# Altium PCB 23972修改.PcbDoc (part 2 of 2)
Units mil, origin at the board's own origin, x right, y up, seen from the top; angles counter-clockwise.
Board outline 7085.81 x 4390 mil, 3 copper layers (Top Layer, Mid-Layer 1, Bottom Layer); 28 components, 107 nets, 1198 pads, 224 vias.
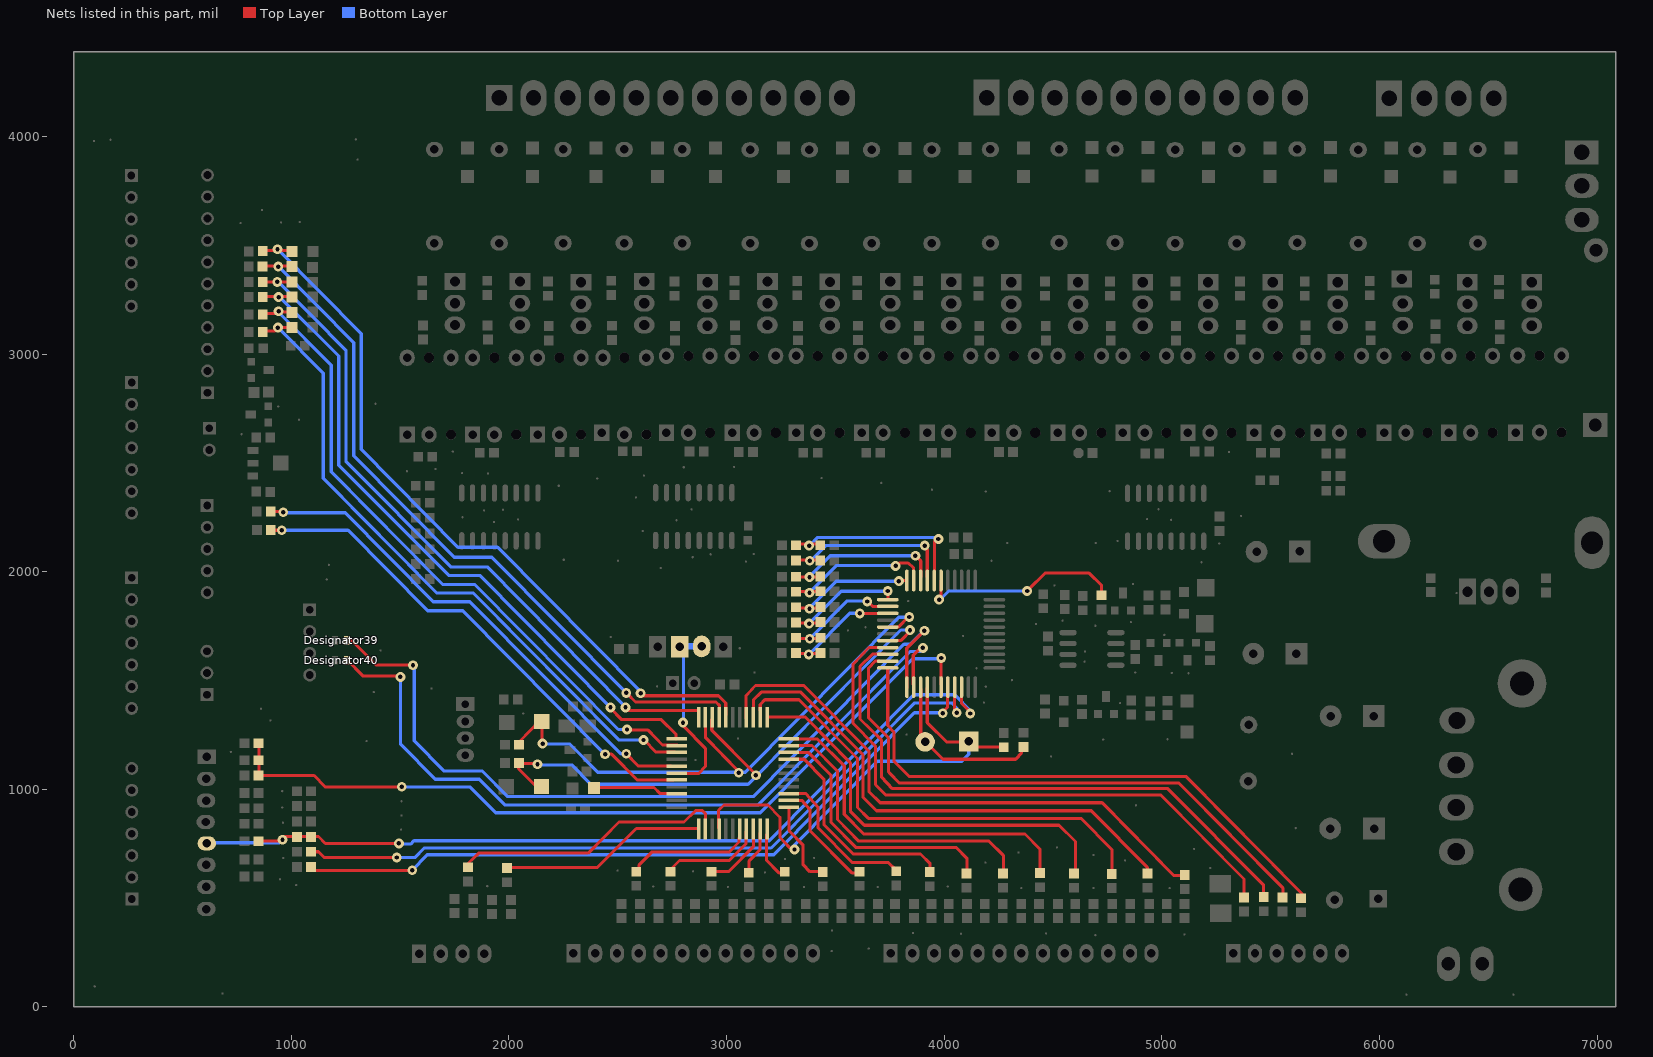
[diagram p2: the nets of this part, all layers, seen from the top]

## Via types
v1: diameter 45, hole 20, Top Layer to Bottom Layer, 219 vias
v2: diameter 161.42, hole 161.42, Top Layer to Bottom Layer, 4 vias
v3: diameter 20, hole 20, Top Layer to Bottom Layer, 1 vias

## Nets (pads, with @x,y where several pads share a name; then routed paths per layer and width w, separated by ;. In a path a pad name is that pad's centre, name@x,y a point inside that pad or via, vN(x,y) a via of type N, cw(c..) or ccw(c..) an arc to the next point about the centre after c; other vN are vias at no path point) (continued)
NewNet55: ?.58 pad.0@960.4,768.33 pad.0@1495.05,751.67 pad.0@4120.46,1348.33 pad.250 pad.256 pad.575 pad.839 | length 4094.3
  Top Layer w14: pad.256@858.09,763.33 v1@953.8,763.33 ; pad.0@962.05,770 962.05,783.33 1125.41,783.33 1156.77,751.67 pad.0@1493.4,751.67 ; ?.58@4079.21,1468.33 4079.21,1396.67 v1@4122.11,1353.33
  Bottom Layer w15: pad.839@606.44,754.58 944.72,754.58 v1@955.86,765.83 ; v1@1486.8,748.75 1548.68,748.75 1563.94,764.17 3197.61,764.17 3860.97,1434.17 4048.68,1434.17 v1@4123.35,1358.75
  other v1: 1495.05,751.67 960.4,768.33 4120.46,1348.33
NewNet56: ?.59 pad.0@1485.15,686.67 pad.0@4057.76,1351.67 pad.249 | length 3395.3
  Top Layer w14: pad.249@1094.06,713.33 1125.41,713.33 1151.82,686.67 pad.0@1480.2,686.67 ; v1@4047.86,1358.33 ?.59@4047.86,1465
  Bottom Layer w15: pad.0@1487.21,686.67 1568.48,686.67 1611.8,730.42 3205.03,730.42 3865.1,1397.08 4035.07,1397.08 4058.58,1373.33 v1@4058.58,1359.58
  other v1: 1485.15,686.67 4057.76,1351.67
NewNet57: ?.60 pad.0@1556.11,628.33 pad.0@3993.4,1350 pad.248 | length 3333.9
  Top Layer w14: pad.248@1084.16,646.67 1102.31,626.67 pad.0@1554.46,626.67 ; v1@3991.75,1355 4016.5,1378.33 ?.60@4016.5,1456.67
  Bottom Layer w15: pad.0@1553.63,626.67 1625.41,699.17 1652.64,699.17 3217,699.17 3863.45,1352.08 pad.0@3993.4,1352.08
  other v1: 1556.11,628.33 3993.4,1350
NewNet58: ?.61 pad.0@1508.25,1011.67 pad.0@3986.8,1603.33 pad.260 pad.261 pad.262 | length 3757.6
  Top Layer w14: pad.262@851.49,1210 851.49,1063.33 1105.61,1063.33 1155.12,1011.67 v1@1500,1011.67 ; ?.61@3985.15,1481.67 pad.0@3985.15,1606.67
  Bottom Layer w15: v1@1514.03,1010.42 1822.61,1010.42 1939.77,892.08 3154.7,892.08 3855.61,1600 pad.0@3984.74,1600
  other v1: 1508.25,1011.67 3986.8,1603.33
NewNet59: ?.30 ?.63 pad.0@3312.71,723.75 pad.498 pad.813 | length 2149
  Top Layer w12: 3187.47,929.33 3246.88,871
  Top Layer w14: ?.30@2963.7,821.67 2963.7,903.33 2988.45,928.33 3186.47,928.33 ; 3245.88,870 3245.88,778.33 3291.25,732.08 ; ?.63@3922.44,1466.67 3922.44,1306.67 4013.2,1216.67 pad.813@4115.51,1216.67 ; pad.813@4136.96,1195 pad.498@4282.18,1195
  Bottom Layer w15.75: v1@3305.28,735.42 3692.24,1130 4081.68,1130 4113.45,1162.08 pad.813@4113.45,1220.83 ; pad.0@3312.29,728.33 v1@3325.08,725.42
  other v1: 3312.71,723.75
NewNet60: ?.64 pad.497 pad.814 | length 769.3
  Top Layer w14: ?.64@3892.74,1460 3892.74,1243.33 3995.05,1138.33 4328.38,1138.33 4356.44,1168.33 pad.497@4356.44,1200
NewNet61: ?.65 Designator40.1@1257.12,1594 pad.0@1501.65,1516.67 pad.0@3902.64,1650 | length 3584
  Top Layer w14: Designator40.1@1257.12,1594 1331.12,1520 pad.0@1498.35,1520 ; ?.65@3858.09,1481.67 3858.09,1616.67 v1@3892.74,1650
  Bottom Layer w15: pad.0@1502.47,1516.67 1502.47,1207.5 1661.72,1046.67 1863.86,1046.67 1981.02,928.33 3145.63,928.33 3843.23,1632.92 3890.26,1632.92 pad.0@3905.53,1648.33
  other v1: 1501.65,1516.67 3902.64,1650
NewNet62: ?.66 Designator39.1 pad.0@1559.41,1570 pad.0@3909.24,1728.33 | length 3750.4
  Top Layer w14: Designator39.1@1257.12,1684 1278,1684 1390.33,1571.67 pad.0@1556.11,1571.67 ; ?.66@3828.38,1466.67 3828.38,1648.33 pad.0@3910.89,1731.67
  Bottom Layer w15: v1@1565.59,1565 1565.59,1223.75 1703.8,1084.17 1879.13,1084.17 1995.46,966.67 3122.53,966.67 3815.59,1666.67 3844.89,1666.67 pad.0@3905.53,1727.92
  other v1: 1559.41,1570 3909.24,1728.33
NewNet63: ?.67 pad.220 | length 2592.7
  Top Layer w14: ?.67@3740.92,1558.33 3740.92,1293.33 3770.63,1261.67 3770.63,1128.33 3838.28,1060 5110.56,1060 5643.56,521.67 pad.220@5643.56,496.67
NewNet64: ?.68 pad.221 | length 2661.5
  Top Layer w14: ?.68@3702.97,1590 3683.17,1590 3651.82,1555 3651.82,1330 3744.23,1236.67 3744.23,1080 3747.52,1076.67 3795.38,1028.33 5079.21,1028.33 5557.76,545 pad.221@5557.76,500
NewNet65: ?.69 pad.222 | length 2706.5
  Top Layer w14: ?.69@3727.72,1621.67 3671.62,1621.67 3613.86,1565 3613.86,1323.33 3712.87,1225 3712.87,1055 3762.38,1003.33 5028.05,1003.33 5467,561.67 pad.222@5467,503.33
NewNet66: ?.70 pad.223 | length 2720.1
  Top Layer w14: ?.70@3716.17,1651.67 3655.12,1651.67 3580.86,1573.33 3580.86,1305 3684.82,1198.33 3684.82,1021.67 3732.67,973.33 4996.7,973.33 5377.89,588.33 pad.223@5377.89,505
NewNet67: ?.3 ?.71 pad.0@2132.01,1115 pad.0@3135.31,1065 pad.0@3843.23,1731.67 pad.242 pad.435 | length 2722.6
  Top Layer w14: pad.435@2123.76,1015 2044.56,1095 2044.56,1118.33 pad.0@2132.01,1118.33 ; ?.3@2932.34,1321.67 2932.34,1271.67 v1@3127.06,1075 ; ?.71@3737.62,1683.33 3800.33,1683.33 pad.0@3848.19,1731.67
  Bottom Layer w15: pad.0@2134.49,1112.08 2288.78,1112.08 2377.06,1022.92 3099.42,1022.92 3801.57,1732.08 pad.0@3843.23,1732.08
  other v1: 3135.31,1065 2132.01,1115 3843.23,1731.67
NewNet68: ?.2 ?.73 pad.0@2155.12,1210 pad.0@3056.11,1076.67 pad.0@3839.93,1791.67 pad.243 pad.433 | length 2702.5
  Top Layer w14: pad.243@2051.16,1205 2051.16,1221.67 2140.26,1313.33 2153.47,1313.33 pad.0@2153.47,1213.33 ; ?.2@2904.29,1318.33 2904.29,1236.67 v1@3056.11,1081.67 ; ?.73@3745.88,1746.67 3792.08,1746.67 pad.0@3834.98,1791.67
  Bottom Layer w15: pad.0@2156.35,1208.33 2280.53,1208.33 2408.83,1078.75 3087.05,1078.75 3791.67,1790.42 pad.0@3843.23,1790.42
  other v1: 3056.11,1076.67 2155.12,1210 3839.93,1791.67
NewNet69: ?.75 pad.0@3377.89,1620 pad.0@3612.21,1808.33 pad.264 pad.528 | length 534.9
  Top Layer w14: pad.264@3313.53,1625 pad.528@3420.79,1625 ; pad.0@3610.56,1808.33 ?.75@3727.72,1808.33
  Bottom Layer w15: pad.0@3379.95,1621.25 3565.59,1808.75 pad.0@3612.21,1808.75
  other v1: 3377.89,1620 3612.21,1808.33
NewNet70: ?.76 pad.0@3382.84,1691.67 pad.0@3646.86,1863.33 pad.265 pad.527 | length 535.8
  Top Layer w14: pad.265@3328.38,1693.33 pad.527@3435.64,1693.33 ; v1(3646.86,1863.33) 3671.62,1840 ?.76@3732.67,1840
  Bottom Layer w15: pad.0@3384.49,1693.33 3555.28,1865.83 pad.0@3646.04,1865.83
  other v1: 3382.84,1691.67
NewNet71: ?.77 pad.0@3379.54,1761.67 pad.0@3740.92,1911.67 pad.266 pad.526 | length 558.2
  Top Layer w14: pad.266@3315.18,1765 pad.526@3427.39,1765 ; ?.77@3742.57,1876.67 v1@3742.57,1906.67
  Bottom Layer w15: pad.0@3381.19,1763.33 3526.4,1910 v1@3735.97,1910
  other v1: 3379.54,1761.67 3740.92,1911.67
NewNet72: ?.78 pad.0@3381.19,1830 pad.0@3792.08,1956.67 pad.267 pad.525 | length 586.8
  Top Layer w14: pad.267@3330.03,1833.33 pad.525@3430.69,1833.33 ; pad.0@3793.73,1960 ?.78@3823.43,1960
  Bottom Layer w15: pad.0@3381.19,1831.67 3504.95,1956.67 v1@3785.48,1956.67
  other v1: 3381.19,1830 3792.08,1956.67
NewNet73: ?.79 pad.0@3381.19,1903.33 pad.0@3777.23,2026.67 pad.268 pad.524 | length 663.2
  Top Layer w14: pad.268@3331.68,1910 pad.524@3422.44,1910 ; pad.0@3777.23,2025 3792.08,2040 3834.98,2040 3859.74,2018.33 ?.79@3859.74,1983.33
  Bottom Layer w15: pad.0@3383.66,1905.83 3504.95,2028.33 pad.0@3773.1,2028.33
  other v1: 3381.19,1903.33 3777.23,2026.67
NewNet74: ?.80 pad.0@3381.19,1975 pad.0@3867.99,2073.33 pad.269 pad.523 | length 731.5
  Top Layer w14: pad.269@3318.48,1976.67 pad.523@3427.39,1976.67 ; v1@3872.94,2070 3892.74,2050 ?.80@3892.74,1976.67
  Bottom Layer w15: pad.0@3381.19,1976.25 3477.31,2073.33 v1@3861.8,2073.33
  other v1: 3381.19,1975 3867.99,2073.33
NewNet75: ?.81 pad.0@3382.84,2050 pad.0@3910.89,2120 pad.270 pad.522 | length 808.5
  Top Layer w14: pad.270@3320.13,2053.33 pad.522@3424.09,2053.33 ; v1@3900.99,2123.33 3922.44,2101.67 ?.81@3922.44,1976.67
  Bottom Layer w15: pad.0@3386.96,2050.83 3455.45,2120 3468.23,2120 pad.0@3907.18,2120
  other v1: 3382.84,2050 3910.89,2120
NewNet76: ?.82 pad.0@3379.54,2120 pad.0@3973.6,2150 pad.279 pad.521 | length 896
  Top Layer w14: pad.279@3321.78,2126.67 pad.521@3417.49,2126.67 ; ?.82@3955.45,1963.33 3955.45,2141.67 v1@3965.35,2151.67
  Bottom Layer w15: pad.0@3382.01,2120.42 3418.73,2157.5 v1@3974.42,2157.5
  other v1: 3379.54,2120 3973.6,2150
NewNet77: ?.83 pad.0@3976.9,1871.67 pad.0@4381.19,1911.67 pad.171 | length 933.2
  Top Layer w14: v1@3981.85,1878.33 v1@3986.8,1883.33 ; v1@3985.15,1883.33 ?.83@3985.15,1958.33 ; v1@4386.14,1916.67 4463.7,1993.33 4666.67,1993.33 4722.77,1938.33 pad.171@4722.77,1896.67
  Bottom Layer w15: pad.0@3980.61,1870.83 4020.22,1910.83 pad.0@4382.84,1910.83
  other v1: 3976.9,1871.67 4381.19,1911.67
NewNet78: ?.1 pad.0@935.64,3331.67 pad.0@2536.3,1376.67 pad.318 pad.604 | length 3158.6
  Top Layer w14: pad.318@879.54,3331.67 pad.604@995.05,3331.67 ; v1@2547.86,1381.67 2547.86,1361.67 ?.1@2871.29,1361.67
  Bottom Layer w15: pad.0@940.59,3331.25 1251.65,3017.08 1251.65,2507.5 1732.26,2022.08 1900.58,2022.08 v1@2531.35,1385
  other v1: 2536.3,1376.67 935.64,3331.67
NewNet79: ?.4 pad.0@940.59,3401.67 pad.0@2539.6,1443.33 pad.605 pad.607 | length 3312
  Top Layer w14: pad.607@874.59,3405 pad.605@983.5,3405 ; v1@2546.2,1436.67 2582.51,1401.67 2952.14,1401.67 2967,1386.67 ?.4@2967,1336.67
  Bottom Layer w15: pad.0@942.24,3402.08 1287.95,3052.92 1287.95,2532.5 1749.18,2066.67 1922.44,2066.67 v1@2535.48,1447.5
  other v1: 2539.6,1443.33 940.59,3401.67
NewNet80: ?.5 pad.0@937.29,3481.67 pad.0@2605.61,1441.67 pad.606 pad.608 | length 3392.2
  Top Layer w14: pad.608@877.89,3475 pad.606@988.45,3475 ; v1@2612.21,1430 2963.7,1430 2996.7,1396.67 ?.5@2996.7,1341.67
  Bottom Layer w15: pad.0@938.53,3480.83 1321.78,3093.75 1321.78,2561.67 1766.09,2112.92 1948.43,2112.92 v1@2608.09,1446.67
  other v1: 2605.61,1441.67 937.29,3481.67
NewNet81: ?.8 pad.224 | length 2622.1
  Top Layer w14: ?.8@3090.76,1326.67 3090.76,1431.67 3133.66,1476.67 3356.44,1476.67 3655.12,1175 3655.12,988.33 3706.27,938.33 4726.07,938.33 5056.11,603.33 pad.224@5115.51,603.33
NewNet82: ?.9 pad.225 | length 2373.3
  Top Layer w14: ?.9@3123.76,1336.67 3123.76,1411.67 3160.07,1446.67 3341.58,1446.67 3627.06,1158.33 3627.06,963.33 3689.77,901.67 4676.57,901.67 4933.99,641.67 pad.225@4933.99,616.67
NewNet83: ?.10 pad.226 | length 2179.7
  Top Layer w14: ?.10@3155.12,1363.33 3155.12,1390 3176.57,1411.67 3333.33,1411.67 3602.31,1141.67 3602.31,916.67 3651.82,866.67 4628.71,866.67 4772.28,721.67 pad.226@4772.28,613.33
NewNet84: ?.11 pad.227 | length 1923.6
  Top Layer w14: ?.11@3193.07,1331.67 3363.04,1331.67 3569.31,1121.67 3569.31,900 3633.66,835 4528.05,835 4603.96,760 pad.227@4603.96,615
NewNet85: ?.12 pad.228 | length 1578.1
  Top Layer w14: ?.12@3310.23,1231.67 3417.49,1231.67 3541.25,1108.33 3541.25,885 3630.36,795 4371.29,795 4440.59,725 pad.228@4440.59,618.33
NewNet86: ?.13 pad.229 | length 1380.3
  Top Layer w14: ?.13@3316.83,1201.67 3392.74,1201.67 3509.9,1083.33 3509.9,861.67 3607.26,761.67 4206.27,761.67 4272.28,696.67 pad.229@4272.28,611.67
NewNet87: ?.14 pad.230 | length 1188.1
  Top Layer w14: ?.14@3316.83,1168.33 3377.89,1168.33 3480.2,1065 3480.2,848.33 3594.06,733.33 4054.46,733.33 4105.61,681.67 pad.230@4105.61,611.67
NewNet88: ?.15 pad.231 | length 991.9
  Top Layer w14: ?.15@3297.03,1138.33 3358.09,1138.33 3447.2,1046.67 3447.2,838.33 3582.51,703.33 3891.09,703.33 3935.64,658.33 pad.231@3935.64,626.67
NewNet89: ?.20 pad.232 | length 694.2
  Top Layer w14: ?.20@3290.43,981.67 3364.28,981.67 3421.28,916.67 3420.79,823.33 3579.21,663.33 3744.23,663.33 pad.232@3780.53,628.33
NewNet90: ?.21 pad.233 | length 516.9
  Top Layer w14: ?.21@3285.48,949.67 3346.28,949.67 3384.28,905.67 3384.49,808.33 3575.91,616.67 pad.233@3605.61,616.67
NewNet91: ?.22 pad.234 | length 385
  Top Layer w14: ?.22@3287.13,916.67 3287.13,810 3352.18,743.67 3352.18,653.67 3382.84,621.67 pad.234@3433.99,621.67
NewNet92: ?.23 pad.235 | length 216.2
  Top Layer w14: ?.23@3184.82,791.67 3184.82,673.33 3240.92,616.67 pad.235@3259.08,616.67
NewNet93: ?.24 pad.236 | length 205.4
  Top Layer w14: pad.236@3103.96,613.33 3103.96,671.67 3153.47,721.67 ?.24@3153.47,798.33
NewNet94: ?.25 pad.237 | length 310.3
  Top Layer w14: pad.237@2927.39,623.33 3011.55,623.33 3123.76,736.67 ?.25@3123.76,803.33
NewNet95: ?.26 pad.238 | length 453.2
  Top Layer w14: pad.238@2742.57,631.67 2783.83,673.33 3013.2,673.33 3090.76,751.67 ?.26@3090.76,806.67
NewNet96: ?.27 pad.239 | length 554.2
  Top Layer w14: pad.239@2599.01,620 2599.01,653.33 2656.77,711.67 3001.65,711.67 3011.55,711.67 3057.76,758.33 ?.27@3057.76,776.67
NewNet97: ?.32 pad.241 | length 1257.1
  Top Layer w14: pad.241@1815.18,650 1815.18,661.67 1861.39,706.67 2364.69,706.67 2506.6,850 2805.28,850 2859.74,903.33 2887.79,903.33 2899.34,893.33 2902.64,888.33 ?.32@2902.64,836.67
NewNet98: ?.33 pad.240 | length 945.2
  Top Layer w14: pad.240@1996.7,641.67 2407.59,641.67 2585.81,820 ?.33@2867.99,820
NewNet99: ?.36 pad.424 | length 387.4
  Top Layer w14: pad.424@2396.04,1008.33 2666.67,1008.33 2693.07,981.67 ?.36@2772.28,981.67
NewNet100: ?.38 pad.0@957.1,2190 pad.0@2442.24,1161.67 pad.594 | length 2321.2
  Top Layer w14: v1@2448.85,1161.67 2472.51,1161.67 2589.28,1043.67 ?.38@2757.43,1043.67
  Top Layer w15: pad.594@902.64,2190 v1(957.1,2190)
  Bottom Layer w15: pad.0@959.57,2190.42 1259.9,2190.42 ; 1261.55,2190 1627.89,1820 1788.78,1820 pad.0@2441.01,1161.25
  other v1: 2442.24,1161.67
NewNet101: ?.39 pad.0@2800.33,1306.67 pad.818 pad.820 | length 786.7
  Top Layer w14: ?.39@2800.33,1073.33 2872.94,1073.33 2902.64,1105 2902.64,1188.33 2803.63,1290 v1@2803.63,1301.67
  Bottom Layer w15: pad.0@2802.47,1307.08 pad.818@2802.47,1655.42
  Bottom Layer w30: pad.818@2800.76,1656.67 pad.820@2886.14,1656.67
  other v1: 2800.33,1306.67
NewNet102: ?.40 pad.0@963.7,2273.33 pad.0@2539.6,1163.33 pad.596 | length 2324.9
  Top Layer w14: v1@2534.65,1168.33 2595.71,1106.67 ?.40@2745.88,1106.67
  Top Layer w15: pad.596@902.64,2276.67 pad.0@962.05,2276.67
  Bottom Layer w15: v1@969.06,2270.83 1248.76,2270.83 1653.05,1862.5 1820.96,1862.5 2511.55,1165 ; 2515.26,1163.75 pad.0@2540.02,1163.75
  other v1: 2539.6,1163.33 963.7,2273.33
NewNet103: ?.42 pad.0@938.94,3121.67 pad.0@2618.81,1226.67 pad.315 pad.601 | length 3047.7
  Top Layer w14: pad.315@867.99,3105 922.44,3105 937.29,3121.67 pad.601@1003.3,3121.67 ; pad.0@2622.11,1226.67 2674.92,1171.67 ?.42@2764.03,1171.67
  Bottom Layer w15: v1@942.66,3117.92 1147.28,2911.25 1147.28,2428.75 1668.73,1902.08 1836.63,1902.08 2504.95,1227.08 ; 2509.9,1226.25 pad.0@2617.16,1226.25
  other v1: 2618.81,1226.67 938.94,3121.67
NewNet104: ?.43 pad.0@942.24,3196.67 pad.0@2542.9,1275 pad.316 pad.602 | length 3085.7
  Top Layer w14: pad.316@864.69,3186.67 932.34,3186.67 937.29,3193.33 pad.602@995.05,3193.33 ; v1@2534.65,1271.67 2640.26,1271.67 2706.27,1203.33 ?.43@2773.93,1203.33
  Bottom Layer w15: pad.0@941.42,3193.33 1183.99,2948.33 1183.99,2458.75 1696.37,1941.25 1844.06,1941.25 2503.71,1275 pad.0@2539.6,1275
  other v1: 2542.9,1275 942.24,3196.67
NewNet105: ?.44 pad.0@942.24,3261.67 pad.0@2467,1376.67 pad.317 pad.603 | length 3084.5
  Top Layer w14: pad.317@879.54,3265 pad.603@996.7,3265 ; v1@2468.65,1371.67 2516.5,1321.67 2698.02,1321.67 2768.98,1251.67 ?.44@2768.98,1231.67
  Bottom Layer w15: pad.0@942.24,3258.33 950.67,3258.33 1218,2991 1218,2488.51 1723.6,1982.92 1866.34,1982.92 pad.0@2464.52,1378.75
  other v1: 2467,1376.67 942.24,3261.67
NewNet106: 
pads on no net: ?.6 ?.16 ?.17 ?.18 ?.19 ?.28 ?.31 ?.34 ?.35 ?.37 ?.48 ?.52 ?.72 ?.85 ?.86 ?.87 ?.88 ?.90 ?.94 ?.95 ?.96 ?.121 Designator32.3 Designator34.1 Designator34.2 Designator34.3 Designator34.4 Designator34.5 Designator34.7 Designator35.1 Designator35.3 Designator35.4 Designator35.5 Designator35.6 Designator35.7 Designator36.1 Designator36.3 Designator36.4 Designator36.5@267,2469 Designator36.6 Designator36.7 Designator37.1 Designator37.3 Designator37.4 Designator37.5 Designator37.6 Designator37.7 Designator38.2 Designator38.3 Designator38.4 Designator38.5 Designator38.6 Designator38.7 Designator38.8 Designator38.10 Designator38.11 Designator39.2 Designator40.2 Designator40.3 Designator41.2
copper on no net: | length 152204.8
  Top Layer w10: 613,1635 663,1635 722.77,1575.23 v1(722.77,1171.67)
  Top Layer w12: 2525.75,475 2596.71,403.33 ; 3698.28,401.67 3765.68,471.67
  Top Layer w13: 2700.97,411.67 2766.98,476.67 ; 3029.35,399.67 3100.31,471.33
  Top Layer w14: 265.68,3420 315.18,3420 349.83,3385.35 349.83,1350 ; 265.68,3520 305.28,3520 ; 267,1572 349.83,1572 ; 267,2469 348,2469 ; 268,695 335,695 349.83,709.84 349.83,1392 ; 351.52,3705.84 265.68,3620 359.74,3714.06 359.74,3853.33 485.15,3978.33 1069.31,3978.33 1336.63,3710 1336.63,2505 1521.45,2318.33 1574.26,2318.33 ; 379.54,3445 305.28,3520 ; v1(439,1393) 491,1445.06 491,2110.97 491,2742 536.3,2787.3 536.3,3845 572.61,3880 980.2,3880 1237.62,3621.67 1237.62,2418.33 1552.81,2098.33 1567.66,2098.33 ; v1@442.24,2813 442.24,3851.67 531.35,3941.67 1031.35,3941.67 1303.63,3666.67 1303.63,2488.33 1544.56,2245 ; v1(443,1308) 394.39,1356.61 394.39,3430.89 305.28,3520 ; v1@447.2,1772 447.2,2746.2 495.05,2794.05 495.05,3853.33 552.8,3910 1009.9,3910 1265.68,3651.67 1265.68,2460 1551.16,2171.67 1570.96,2171.67 ; 614,2004 653,2004 841.95,2192.95 ; 614,2104 668.92,2104 841.58,2276.67 ; 615.51,2922.4 626.02,2922.4 721,3017.39 805.28,3101.67 ; 615.51,3022.4 635.4,3022.4 799.67,3186.67 ; 615.51,3122.4 651.13,3122.4 793.73,3265 ; 615.51,3222.4 678.4,3222.4 787.67,3331.67 797.03,3331.67 ; 615.51,3322.4 686.4,3322.4 769,3405 806.93,3405 ; 615.51,3422.4 712.4,3422.4 761.67,3471.67 811.88,3471.67 ; 615.51,3722.4 990.1,3722.4 1032.48,3722.19 1169.97,3583.33 1169.97,2328.33 1534.65,1960 1572.61,1960 ; 615.51,3830 624.51,3821 981.94,3821 1206.27,3596.67 1206.27,2371.67 1541.25,2033.33 1564.36,2033.33 ; v1@722.77,1173.33 760.73,1133.33 785.48,1133.33 ; 791.49,2143.33 851.49,2203.33 ; 843.24,988.33 1019.8,988.33 ; 851.49,915 1019.8,915 ; 854.79,683.33 962.05,683.33 993.4,715 1024.75,715 ; v1@856.44,1370 1633.66,1370 1689.77,1313.33 1858.09,1313.33 1967,1203.33 ; 859.74,601.67 937.29,601.67 945.54,591.67 962.05,591.67 1014.85,646.67 ; v1@909.24,1320 1617.16,1320 1702.97,1233.33 1848.18,1233.33 1963.7,1118.33 1976.9,1118.33 ; v1(1023,2372) 1023,2268.82 1485.15,1806.67 1986.8,1806.67 2047.86,1866.67 3174.92,1866.67 3216.17,1908.33 3252.47,1908.33 ; v1(1058,2441) 1067.66,2431.34 1067.66,2266.67 1495.05,1836.67 1973.6,1836.67 2033,1896.67 3141.91,1896.67 3217.82,1975 3255.78,1975 ; v1(1083.84,2799) 1102.31,2780 1102.31,2286.67 1511.55,1875 1953.8,1875 2013.2,1933.33 3105.61,1933.33 3221.12,2051.67 3255.78,2051.67 ; v1(1089,2882.5) 1136.96,2833.33 1136.96,2310 1537.95,1905 1938.94,1905 1998.35,1965 3075.91,1965 3227.72,2118.33 3260.73,2118.33 ; v1@1168.32,1966.67 1404.29,1728.33 2018.15,1728.33 2099.01,1810 3176.57,1810 3214.52,1771.67 3240.92,1771.67 ; v1@1173.27,2038.33 1445.55,1763.33 2004.95,1763.33 2077.56,1836.67 3249.18,1836.67 ; v1@1372.94,1685 2031.35,1685 2123.76,1778.33 3135.31,1778.33 3216.17,1698.33 3254.13,1698.33 ; v1@1414.19,1641.67 2041.25,1641.67 2146.87,1746.67 3107.26,1746.67 3224.42,1628.33 3255.78,1628.33 ; 1587.46,2525 1587.46,2548.33 1623.76,2583.33 1623.76,2613.33 ; 1683.17,251.67 1833.33,401.67 1833.33,425 ; 1775.58,258.33 1930.69,413.33 ; 1811.88,573.33 1747.53,506.67 1823.43,430 ; 1930.69,2551.67 1930.69,2621.67 ; 1938.94,428.33 2003.3,495 2003.3,576.67 ; 2235.97,2553.33 2235.97,2631.67 ; 2313.53,978.33 2291.51,991.42 2348.18,916.67 ; 2528.05,2556.67 2528.05,2618.33 ; 2823.43,2553.33 2823.43,2623.33 ; 3226.07,1770 3252.47,1770 ; 3419.14,2541.67 3419.14,2626.67 ; 3709.57,2545 3709.57,2638.33 ; 4457.1,1351.67 4486.8,1351.67 4542.9,1406.67 ; 4673.27,251.67 4762.38,341.67 4902.64,341.67 4943.89,381.67 4943.89,406.67 ; 4759.08,246.67 4825.08,311.67 4963.7,311.67 5026.4,376.67 5026.4,396.67 5097.36,466.67 ; 4849.84,461.67 4849.84,496.67 4899.34,546.67 4935.64,546.67 ; 4922.44,2540 4922.44,2643.33 ; 5023.1,1893.33 5102.31,1811.67 ; 5108.91,471.67 5108.91,545 ; 5123.76,1266.67 5168.32,1266.67 5214.52,1220 5858.09,1220 5962.05,1325 ; 5377.89,428.33 5377.89,343.33 5429.04,291.67 5429.04,256.67 ; 5470.3,440 5470.3,346.67 5529.7,286.67 5529.7,251.67 ; 5523.1,2416.67 5602.31,2416.67 5676.57,2491.67 5993.4,2491.67 6118.81,2616.67 ; 5531.35,2546.67 5531.35,2631.67 ; 5556.11,430 5556.11,346.67 5633.66,266.67 5633.66,251.67 ; 5638.61,433.33 5638.61,383.33 5727.72,291.67 5727.72,263.33 ; 5823.43,2538.33 5823.43,2626.67 ; 5826.73,2370 6511.55,2370 6729.37,2590 6729.37,2636.67 ; 5834.98,2438.33 6252.48,2438.33 6420.79,2608.33 6420.79,2633.33
  Top Layer w15: 1085,1625 1116,1594 1202,1594 ; 1086,1724 1126,1684 1202,1684 ; 2391.09,261.67 2442.24,313.33 2513.2,313.33 2595.71,398.33 ; 2506.6,256.67 2575.91,326.67 2607.26,326.67 2684.82,406.67 2702.97,406.67 ; 2524.75,470 2508.25,486.67 2575.91,556.67 ; 2612.21,256.67 2696.37,341.67 2922.44,341.67 2942.24,361.67 2942.24,396.67 2864.69,475 2864.69,470 2859.74,470 2854.79,470 2854.79,491.67 2924.09,561.67 2932.34,561.67 ; 2709.57,253.33 2764.03,308.33 2983.5,308.33 3031.35,356.67 3031.35,396.67 ; 2744.22,553.33 2768.98,530 2768.98,471.67 ; 3011.55,260 3062.71,311.67 3138.61,311.67 3191.42,366.67 3244.22,366.67 3270.63,391.67 3270.63,413.33 ; 3097.36,250 3120.46,250 3206.27,336.67 3328.38,336.67 3364.69,375 3364.69,398.33 3442.24,475 3442.24,555 ; 3102.31,468.33 3107.26,468.33 3110.56,471.67 3110.56,551.67 ; 3196.37,246.67 3259.08,308.33 3537.95,308.33 3612.21,383.33 3612.21,411.67 3602.31,411.67 3544.56,471.67 ; 3257.43,558.33 3189.77,491.67 3189.77,476.67 3189.77,475 3194.72,470 3199.67,470 3265.68,403.33 ; 3292.08,231.67 3349.84,171.67 3470.3,171.67 3698.28,401.67 ; 3531.35,485 3605.61,561.67 ; 3765.68,471.67 3783.83,471.67 3783.83,558.33 ; 3856.44,248.33 3942.24,335 3942.24,400 3876.24,466.67 3856.44,466.67 3856.44,515 3896.04,555 3930.69,555 ; 3952.15,246.67 4023.1,316.67 4023.1,393.33 ; 4008.25,2546.67 4008.25,2625 4021.45,2638.33 ; 4019.1,397.33 4099.96,479 ; 4074.26,253.33 4166.67,346.67 4244.23,346.67 4272.28,375 4272.28,393.33 4201.32,466.67 4188.12,466.67 4188.12,508.33 4226.07,546.67 4264.03,546.67 ; 4103.96,475 4107.26,475 4107.26,546.67 ; 4163.37,251.67 4221.12,310 4306.93,310 4348.19,351.67 4348.19,391.67 4427.39,471.67 4438.94,471.67 4438.94,551.67 ; 4316.83,2550 4316.83,2635 4320.13,2638.33 ; 4465.35,250 4603.96,390 4603.96,398.33 4541.25,461.67 ; 4521.45,480 4592.41,553.33 ; 4552.81,256.67 4758.28,466.67 4759.08,465 4764.03,465 4770.63,471.67 4770.63,543.33 ; 4617.16,2545 4617.16,2631.67 ; 4867.99,468.33 4932.34,401.67 ; 4947.19,1403.33 4953.03,1403.33 5093.6,1403.34 ; 5217.82,2551.67 5217.82,2635
  Top Layer w20: 821.78,2615 825.08,2611.7 825.08,2556.67 ; 823.43,2440 823.43,2384.83 839.93,2368.33 ; 1062.71,3038.33 1099.01,3074.64 1099.01,3123.33 ; 1102.31,3130 1102.31,3470 ; 3127.06,2554.95 3127.06,2638.33
  Top Layer w25: 1825.08,2986.67 1904.29,3066.67 ; 2132.01,2983.33 2132.01,3010 2183.17,3061.67 ; 2432.34,2983.33 2432.34,3013.33 2470.3,3053.33 ; 2724.42,2991.67 2724.42,3021.67 2764.03,3061.67 ; 3026.4,2991.67 3026.4,3058.33 ; 3320.13,3000 3320.13,3055 ; 3603.96,3065 3617.16,3051.67 3617.16,3000 ; 3884.49,3063.33 3922.44,3025 3922.44,2991.67 ; 4176.57,3060 4219.47,3016.67 4219.47,2991.67 ; 4468.65,3061.67 4523.1,3006.67 4523.1,2991.67 ; 4777.23,3055 4821.78,3011.67 4821.78,2991.67 ; 5066.01,3061.67 5120.46,3006.67 5120.46,2991.67 ; 5267.33,428.33 5267.33,378.33 5326.73,320 5326.73,256.67 ; 5376.24,3053.33 5430.69,3000 5438.94,3000 ; 5669.97,3060 5717.82,3011.67 5717.82,2991.67 ; 5960.4,3063.33 5996.7,3063.33 6021.45,3030 ; 6021.45,2991.67 6021.45,3028.33 ; 6270.63,3065 6288.78,3065 6318.48,3026.67 6318.48,2991.67 ; 6566.01,3068.33 6585.81,3068.33 ; 6585.81,3070 6632.01,3016.67 6632.01,3003.33
  Top Layer w30: 614,2304 751.67,2441.67 810.23,2441.67 ; 624,2559 699.61,2559 v1(772.28,2631.67) ; v1@777.23,2630 806.93,2630 821.78,2615 843.24,2615 ; 1533,2991.67 1605.61,3066.67 ; 1602.31,3131.67 1602.31,3271.67 ; 1608.91,3133.33 1752.47,3133.33 ; 1615.51,3333.33 1752.47,3333.33 ; 1900.99,3131.67 1900.99,3271.67 ; 1905.94,3133.33 2051.16,3133.33 ; 1914.19,3333.33 2051.16,3333.33 ; 2179.87,3128.33 2179.87,3268.33 ; 2186.47,3130 2331.68,3130 ; 2193.07,3330 2331.68,3330 ; 2470.3,3130 2470.3,3271.67 ; 2476.9,3133.33 2622.11,3133.33 ; 2483.5,3333.33 2622.11,3333.33 ; 2760.73,3128.33 2760.73,3268.33 ; 2767.33,3130 2912.54,3130 ; 2773.93,3330 2912.54,3330 ; 3036.3,3131.67 3036.3,3271.67 ; 3042.9,3133.33 3188.12,3133.33 ; 3051.16,3333.33 3188.12,3333.33 ; 3325.08,3128.33 3325.08,3270 ; 3330.03,3131.67 3475.25,3131.67 ; 3338.28,3331.67 3475.25,3331.67 ; 3600.66,3130 3600.66,3271.67 ; 3607.26,3133.33 3752.48,3133.33 ; 3613.86,3333.33 3752.48,3333.33 ; 3881.19,3128.33 3881.19,3270 ; 3887.79,3131.67 4033,3131.67 ; 3894.39,3331.67 4033,3331.67 ; 4158.42,3128.33 4158.42,3268.33 ; 4163.37,3130 4308.58,3130 ; 4171.62,3330 4308.58,3330 ; 4463.7,3128.33 4463.7,3268.33 ; 4470.3,3130 4615.51,3130 ; 4476.9,3330 4615.51,3330 ; 4762.38,3128.33 4762.38,3268.33 ; 4768.98,3130 4912.54,3130 ; 4775.58,3330 4912.54,3330 ; 5062.71,3128.33 5062.71,3268.33 ; 5069.31,3130 5212.87,3130 ; 5075.91,3330 5212.87,3330 ; 5359.74,3128.33 5359.74,3268.33 ; 5364.69,3130 5509.9,3130 ; 5372.94,3330 5509.9,3330 ; 5656.77,3128.33 5656.77,3268.33 ; 5663.37,3130 5808.58,3130 ; 5669.97,3330 5808.58,3330 ; 5955.45,3130 5955.45,3270 ; 5962.05,3131.67 6107.26,3131.67 ; 5968.65,3331.67 6107.26,3331.67 ; 6254.12,3136.67 6254.12,3276.67 ; 6259.08,3130 6404.29,3130 ; 6267.33,3341.67 6404.29,3341.67 ; 6549.51,3128.33 6549.51,3268.33 ; 6554.45,3130 6699.67,3130 ; 6562.71,3330 6699.67,3330
  Top Layer w60: 1656.77,3945 1803.63,3945 ; 1737.62,2991.67 1737.62,2943.33 1782.18,2898.33 6734.32,2898.33 6744.22,2898.33 6825.08,2980 ; 1953.8,3945 2100.66,3945 ; 2034.65,2903.33 2034.65,2986.67 ; 2331.68,2913.33 2331.68,2988.33 ; 2632.01,2913.33 2632.01,2988.33 ; 2924.09,2921.67 2924.09,2996.67 ; 3226.07,2921.67 3226.07,2996.67 ; 3519.8,2921.67 3519.8,2996.67 ; 3820.13,2921.67 3820.13,2996.67 ; 4122.11,2921.67 4122.11,2996.67 ; 4419.14,2921.67 4419.14,2996.67 ; 4722.77,2921.67 4722.77,2996.67 ; 5021.45,2921.67 5021.45,2996.67 ; 5320.13,2921.67 5320.13,2996.67 ; 5635.31,2921.67 5635.31,2996.67 ; 5917.49,2921.67 5917.49,2996.67 ; 6171.62,3943.33 6305.28,3943.33 ; 6217.82,2921.67 6217.82,2996.67 ; 6455.45,3941.67 6592.41,3941.67 ; 6519.8,2921.67 6519.8,2996.67
  Top Layer w70: 1823.43,3806.67 6580.86,3806.67 6806.93,3578.33 6806.93,3246.67 6792.08,3231.67 6702.97,3231.67 ; 2252.47,3938.33 2372.94,3938.33 ; 2533,3941.67 2655.12,3941.67 ; 2803.63,3940 2925.74,3940 ; 3123.76,3941.67 3227.72,3941.67 ; 3384.49,3936.67 3511.55,3936.67 ; 3673.27,3941.67 3803.63,3941.67 ; 3940.59,3938.33 4100.66,3938.33 ; 4214.52,3943.33 4351.48,3943.33 ; 4526.4,3945 4641.91,3945 ; 4780.53,3943.33 4910.89,3943.33 ; 5077.56,3951.67 5198.02,3951.67 ; 5343.23,3946.67 5475.25,3946.67 ; 5633.66,3940 5752.48,3940 ; 5902.64,3936.67 6016.5,3936.67
  Top Layer w80: 5643.56,2086.67 5833.33,1893.33 v1@6371.29,1893.33 ; 6310.23,911.67 6287.13,911.67 6189.77,811.67 6189.77,616.67 6316.83,488.33 6316.83,483.33 6316.83,196.67 ; 6359.74,1111.67 6445.55,1111.67 6453.8,1111.67 6552.81,1011.67 6552.81,690 6471.95,608.33 6471.95,216.67
  Bottom Layer w14: 267,1472 289,1472 480,1663 848.67,2031.67 v1(1173.27,2031.67)
  Bottom Layer w15: 267,1672 v1(393,1672) ; 267,1772 v1(446,1772) ; 267,2266 359,2266 465,2372 882.17,2372 v1(1023,2372) ; 267,2368 325,2368 398,2441 490.07,2441 626.07,2441 v1(1058,2441) ; 267,2569 v1(394,2569) ; 267,2669 367,2669 443.89,2745.89 v1(443.89,2813) ; 268,494 471,494 512,535 512,1179 566.33,1233.33 605,1233.33 1025.99,1233.33 1419.55,1630.83 v1@1414.6,1635.83 ; 268,595 435,595 472,632 472,1187 555,1270 611,1270 966.58,1270 v1@1375.82,1683.33 ; 268,695 398,695 437,734 437,1203 545.25,1311.25 571,1311.25 ; 268,795 372,795 398,821 398,1264 501.5,1367.5 556,1367.5 v1@868.81,1367.5 ; 268,895 329,895 349,915 349,1303.06 ; 271.5,1367.5 271.5,1376.5 525,1630 525,1646 844,1965 v1(1163.37,1965) ; 275.86,3220 265,3209.14 265,3083 354.79,2993.21 474,2874 1008.84,2874 v1(1083.84,2799) ; 277.14,3320 277.14,3302.86 331,3249 331,3068 430,2969 1002.5,2969 v1(1089,2882.5) ; 349.06,1303.06 v1(439,1393) ; 565,1311.25 v1@903.47,1311.25 ; 611.8,1044.17 911.72,1044.17 v1@962.05,993.33 ; 613.45,948.33 936.06,948.33 v1@962.46,921.67 ; 614.69,551.67 909.24,551.67 v1@943.07,585.83 ; 614.69,654.17 935.64,654.17 v1@965.35,684.17 ; v1@1157.03,1979.17 v1@1172.03,1964.17
  Bottom Layer w30: 290.84,3820 585.34,3522.55 615.51,3522.4
  Bottom Layer w45: 6192.24,4187.5 6192.24,4284.17 6229.37,4284.17 6229.37,4189.17
  Bottom Layer w50: 162.63,2869 267,2869 ; 267,1972 454,2159 599,2304 614,2304
  Bottom Layer w70: 170.47,1972 267,1972 ; 171.47,1096 268,1096
  Bottom Layer w75: 256.19,3826.25 203.38,3826.25 138.61,3760.83 138.61,451.39 245.83,344.17 712.05,344.17 829.21,462.5 1160.89,462.5 1553.63,65.83 5990.1,65.83 6111.39,188.33 6111.39,389.17 6012.38,489.17 ; 1768.98,3226.67 6868.81,3226.67 6993.4,3100.83 6993.4,2669.17 ; 2058.58,3331.67 2058.58,3389.17 1962.87,3485.83 1955.86,3492.92 2142.74,3681.67 2142.74,3957.08 2279.29,4095 2279.29,4170 ; 2332.92,3345 2332.92,3423.33 2256.6,3500.42 2433.99,3679.58 2433.99,4175.83 ; 2599.42,4169.17 2599.42,4060 2672.86,3985.83 2672.86,3639.17 2534.24,3499.17 2630.78,3401.67 2630.78,3327.08 ; 2898.51,4179.17 2898.51,3605 2809.41,3515 2907.59,3415.83 2907.59,3343.33 ; 3063.53,4167.5 3063.53,4051.67 3023.93,4011.67 3023.93,3586.67 3190.59,3418.33 3190.59,3332.5 ; 3218.65,4181.67 3218.65,4096.67 3264.03,4050.83 3264.03,3620 3474.42,3407.5 3474.42,3350 ; 3374.59,4155.83 3374.59,4096.67 3672.44,3795.83 3672.44,3504.17 3695.55,3480.83 3759.9,3415.83 3759.9,3329.17 ; 3540.43,4187.5 3540.43,4290.83 ; 4047.86,3357.5 4047.86,3423.33 3962.05,3510 3966.17,3514.17 4117.99,3667.5 4117.99,4009.17 4188.12,4080 4188.12,4191.67 ; 4308.58,3331.67 4308.58,3427.5 4228.55,3508.33 4325.08,3605.83 4325.08,4048.33 4347.36,4070.83 4347.36,4161.67 ; 4512.38,4183.33 4512.38,4083.33 4430.69,4000.83 4430.69,3594.17 4614.69,3408.33 4614.69,3350 ; 4675.74,4158.33 4675.74,3614.17 4915.02,3372.5 4915.02,3340.83 ; 4830.03,4184.17 4830.03,4285.83 ; 4989.27,4170.83 4989.27,4041.67 4958.75,4010.83 4958.75,3590 5198.02,3348.33 ; 5138.61,4118.33 5231.85,4024.17 5231.85,3610.83 5508.25,3331.67 ; 5297.86,4183.33 5297.86,4138.33 5504.12,3930 5504.12,3626.67 5792.9,3335 ; 5461.22,4135 5562.71,4032.5 5700.49,4032.5 5801.15,3930.83 5801.15,3612.5 6066.01,3345 6096.53,3345 ; 5609.74,4177.5 5609.74,4290 ; 5645.22,2095 5645.22,1845.83 5982.67,1505 5982.67,816.67 5795.38,627.5 5795.38,488.33 ; 6004.12,1315 6349.01,1315 ; 6045.38,4170 6045.38,3625.83 6154.29,3515.83 6179.87,3515.83 6362.21,3331.67 6390.26,3331.67 ; 6358.09,4140 6358.09,3620.83 6365.51,3613.33 6639.44,3336.67 6705.45,3336.67 ; 6835.81,2994.17 6975.25,2994.17
  Bottom Layer w80: 1754.95,3346.67 1754.95,3420.83 1656.77,3520 1656.77,3780 1923.27,4049.17 2058.58,4049.17 2120.46,4111.67 2120.46,4185 ; 2755.78,4180.83 2755.78,4260 2810.23,4315 6452.97,4315 6514.03,4253.33 6514.03,4174.17 ; 6935.64,3612.5 6981.02,3566.67 6991.75,3555.83 6991.75,3492.5
  Bottom Layer w90: 6895.22,3920 6783,3920 6537.13,4168.33 6515.68,4168.33 6510.73,4173.33 6510.73,4201.67 6584.98,4201.67 6849.84,3934.17 6910.89,3934.17
  other v1: 6310.23,251.67 6473.6,266.67 948.84,586.67 963.7,685 6282.18,913.33 958.75,916.67 958.75,991.67 6425.74,1116.67 904.29,1316.67 861.39,1370 1410.89,1638.33 1367.99,1688.33 6354.78,1901.67
  other v2: 975,204 6881,207 987,4163 6888,4166

## Polygon pours and split planes (outlines as drawn)
NewNet3 on Top Layer "Bottom Layer-No Net" (hatched 90Degree grid 15.75 track 15.75, remove dead copper, pour order 2): 1448.85,3901.67 1448.85,2893.16 1554,2788 1543,2788 1447,2692 1447,2532 1485,2494 1569,2578 7170,2578 7170,-121 7055,-236 85,-236 -305,154 -200,259 -200,4719 1284,4719 1458,4545
NewNet3 on Bottom Layer "Bottom Layer-No Net" (hatched 90Degree grid 15.75 track 15.75, remove dead copper, pour order 2): 1448.85,3901.67 1448.85,2893.16 1554,2788 1543,2788 1447,2692 1447,2532 1485,2494 1569,2578 7170,2578 7170,-121 7055,-236 85,-236 -305,154 -200,259 -200,4719 1284,4719 1458,4545

## Keep-outs
Keep-Out Layer:
  lines w10: 0,0 0,4390 7085.81,4390 7085.81,0 0,0
  lines w59: 1448.85,2898.33 1448.85,3901.67 ; 1562.71,2788.33 1721.12,2788.33 ; 1863.04,2788.33 2021.45,2788.33 ; 2161.72,2788.33 2320.13,2788.33 ; 2460.4,2788.33 2618.81,2788.33 ; 2754.13,2796.67 2912.54,2796.67 ; 3054.46,2796.67 3212.87,2796.67 ; 3348.18,2796.67 3506.6,2796.67 ; 3648.52,2796.67 3806.93,2796.67 ; 3950.49,2796.67 4108.91,2796.67 ; 4249.18,2796.67 4407.59,2796.67 ; 4551.15,2796.67 4709.57,2796.67 ; 4851.48,2796.67 5009.9,2796.67 ; 5150.16,2796.67 5308.58,2796.67 ; 5463.7,2795 5622.11,2795 ; 5745.88,2796.67 5904.29,2796.67 ; 6051.15,2796.67 6209.57,2796.67 ; 6348.19,2796.67 6506.6,2796.67 ; 6665.02,2798.33 6823.43,2798.33

## Silkscreen, mask and mechanical layers (free items; w line width, h text height)
Top Overlay:
  drawing of 6641 lines, arcs and shapes, not listed
  text "OUT" at 1754.13,4171.67 h27
  text "OUT2" at 3967,4166.67 h27
  text "WB23972" at 103.48,4161.33 h60
  text "OUT3" at 5838.28,4156.67 h27
  text "AC2" at 6914.19,4038.33 h27
  text "R34" at 1760.73,3718.33 h27
  text "R43" at 2061.06,3716.67 h27
  text "R117" at 4617.16,3715 h27
  text "R51" at 2354.79,3713.33 h27
  text "R71" at 2930.69,3711.67 h27
  text "R78" at 3222.77,3711.67 h27
  text "R159" at 6559.41,3711.67 h27
  text "R132" at 5155.12,3710 h27
  text "R148" at 5996.7,3710 h27
  text "R108" at 4331.68,3708.33 h27
  text "R58" at 2635.31,3706.67 h27
  text "R97" at 3773.93,3705 h27
  text "R148" at 5734.32,3705 h27
  text "R85" at 3498.35,3703.33 h27
  text "R127" at 4881.19,3703.33 h27
  text "R156" at 6278.88,3703.33 h27
  text "R138" at 5445.55,3701.67 h27
  text "R100" at 4044.56,3698.33 h27
  text "C29" at 3349.84,3686.67 h27
  text "C37" at 4173.27,3666.67 h27
  text "C55" at 5595.71,3666.67 h27
  text "C44" at 4744.22,3660 h27
  text "C6" at 1632.6,3652.33 h27
  text "C32" at 3627.06,3651.67 h27
  text "C48" at 5011.55,3648.33 h27
  text "C59" at 5869.64,3646.67 h27
  text "C7" at 1919.14,3643.33 h27
  text "C10" at 2214.52,3641.67 h27
  text "C51" at 5320.13,3641.67 h27
  text "C36" at 3897.69,3638.33 h27
  text "C25" at 3079.21,3636.67 h27
  text "C63" at 6435.64,3633.33 h27
  text "C41" at 4491.75,3628.33 h27
  text "C12" at 2495.05,3626.67 h27
  text "C61" at 6150.16,3621.67 h27
  text "C15" at 2750.83,3613.33 h27
  text "LC_PORT" at 512,3604 h27 r90
  text "A" at 121,3568 h108 r180
  text "A" at 1194.72,3498.33 h60 r180
  text "R14" at 763.6,3461.33 h28 r90
  text "B" at 1198.02,3425 h60 r180
  text "A" at 687,3413 h27
  text "R33" at 1556.11,3400 h27
  text "R41" at 1877.89,3396.67 h27
  text "R54" at 2443.89,3396.67 h27
  text "R155" at 6217.82,3396.67 h27
  text "Q5" at 2542.9,3395 h27
  text "R158" at 6511.55,3395 h27
  text "R88" at 3580.86,3393.33 h27
  text "Q19" at 5732.67,3393.33 h27
  text "R73" at 3019.8,3391.67 h27
  text "Q9" at 3678.22,3391.67 h27
  text "Q11" at 4264.03,3391.67 h27
  text "Q20" at 6034.65,3391.67 h27
  text "Q2" at 1679.87,3390 h27
  text "R45" at 2163.37,3390 h27
  text "Q6" at 2839.93,3390 h27
  text "R96" at 3866.34,3390 h27
  text "R112" at 4422.44,3390 h27
  text "R123" at 4729.37,3390 h27
  text "R142" at 5627.06,3390 h27
  text "Q3" at 1973.6,3388.33 h27
  text "R69" at 2735.97,3388.33 h27
  text "Q10" at 3955.45,3388.33 h27
  text "R103" at 4143.56,3388.33 h27
  text "Q16" at 4839.93,3388.33 h27
  text "R129" at 5023.1,3388.33 h27
  text "Q17" at 5130.36,3388.33 h27
  text "R135" at 5325.08,3388.33 h27
  text "R152" at 5920.79,3388.33 h27
  text "R81" at 3301.98,3386.67 h27
  text "Q8" at 3402.64,3386.67 h27
  text "Q14" at 4546.2,3386.67 h27
  text "Q22" at 6638.61,3386.67 h27
  text "Q4" at 2257.43,3385 h27
  text "Q7" at 3107.26,3383.33 h27
  text "R13" at 763.6,3380.34 h28 r90
  text "Q18" at 5448.85,3376.67 h27
  text "R160" at 6866.34,3363.33 h27
  text "Q21" at 6349.84,3360 h27 r90
  text "C" at 1202.97,3346.67 h60 r180
  text "B" at 684,3311 h27
  text "R12" at 765.6,3301.34 h28 r90
  text "D" at 1199.67,3265 h60 r180
  text "R11" at 764.6,3233.34 h28 r90
  text "C" at 683,3215 h27
  text "R154" at 6216.17,3193.33 h27
  text "7" at 1189.77,3191.67 h60 r180
  text "R40" at 1871.29,3190 h27
  text "R102" at 4151.82,3190 h27
  text "R141" at 5625.41,3190 h27
  text "R157" at 6518.15,3190 h27
  text "R87" at 3579.21,3188.33 h27
  text "R32" at 1577.56,3186.67 h27
  text "R134" at 5325.08,3186.67 h27
  text "R151" at 5917.49,3186.67 h27
  text "R72" at 3018.15,3185 h27
  text "R128" at 5026.4,3185 h27
  text "R49" at 2160.07,3183.33 h27
  text "R95" at 3856.44,3183.33 h27
  text "R111" at 4422.44,3183.33 h27
  text "R122" at 4721.12,3183.33 h27
  text "R68" at 2732.67,3181.67 h27
  text "R80" at 3297.03,3181.67 h27
  text "R53" at 2442.24,3180 h27
  text "R10" at 764.6,3148.34 h28 r90
  text "D" at 684,3115 h27
  text "8" at 1193.07,3110 h60 r180
  text "R9" at 764.6,3077.34 h28 r90
  text "7" at 682,3013 h27
  text "R18" at 1132.01,3011.67 h27
  text "R17" at 762.6,2991.34 h28 r90
  text "8" at 693,2909 h27
  text "Q24" at 779.6,2885.34 h28 r90
  text "U1" at 1440.59,2820 h27
  text "R171" at 947.2,2810 h27
  text "PW" at 470.3,2738.33 h27 r90
  text "U11" at 3600.66,2736.67 h27
  text "U7" at 2701.32,2735 h27
  text "U19" at 5702.97,2735 h27
  text "U23" at 6603.96,2735 h27
  text "U4" at 2117.16,2733.33 h27
  text "U9" at 3308.58,2733.33 h27
  text "U12" at 3891.09,2733.33 h27
  text "U15" at 4511.55,2733.33 h27
  text "U16" at 4790.43,2733.33 h27
  text "U8" at 3003.3,2731.67 h27
  text "U17" at 5097.36,2731.67 h27
  text "U21" at 6301.98,2731.67 h27
  text "U2" at 1803.63,2730 h27
  text "U14" at 4196.37,2730 h27
  text "U18" at 5404.29,2730 h27
  text "U20" at 5993.4,2730 h27
  text "U6" at 2404.29,2726.67 h27
  text "Q1" at 768.98,2706.67 h27 r90
  text "B" at 140,2626 h108 r180
  text "C68" at 960.4,2611.67 h27
  text "R56" at 2397.69,2551.67 h27
  text "R92" at 3759.08,2540 h27
  text "R125" at 4797.03,2540 h27
  text "GSM" at 552.8,2538.33 h27
  text "R39" at 1991.75,2536.67 h27
  text "R48" at 2115.51,2536.67 h27
  text "R70" at 2707.92,2536.67 h27
  text "R107" at 4372.94,2536.67 h27
  text "R99" at 4066.01,2533.33 h27
  text "R115" at 4495.05,2533.33 h27
  text "R137" at 5325.08,2533.33 h27
  text "R147" at 5618.81,2528.33 h27
  text "R76" at 3174.92,2526.67 h27
  text "R83" at 3468.65,2526.67 h27
  text "R130" at 5031.35,2526.67 h27
  text "R31" at 1471.95,2515 h27
  text "U27" at 1004.95,2433.33 h27
  text "R146" at 5613.86,2433.33 h27
  text "R136" at 5315.18,2413.33 h27
  text "C4" at 1698.02,2373.33 h27
  text "U26" at 5232.67,2373.33 h27
  text "C67" at 957.1,2370 h27
  text "U25" at 3069.31,2360 h27
  text "R145" at 5610.56,2360 h27
  text "U24" at 2176.57,2343.33 h27
  text "C49" at 5242.57,2305 h27
  text "R29" at 1691.42,2301.67 h27
  text "C27" at 3079.21,2260 h27
  text "R37" at 991.75,2245 h27
  text "R28" at 1681.52,2236.67 h27
  text "R27" at 1693.07,2165 h27
  text "R36" at 995.05,2158.33 h27
  text "C73" at 4161.72,2153.33 h27
  text "C50" at 5811.88,2145 h27
  text "R67" at 3145.22,2110 h27
  text "C23" at 3551.15,2105 h27
  text "R26" at 1696.37,2085 h27
  text "C31" at 4161.72,2085 h27
  text "C22" at 3547.86,2035 h27
  text "R65" at 3136.96,2033.33 h27
  text "U10" at 4264.03,2015 h27
  text "R24" at 1693.07,2010 h27
  text "D8" at 5183.17,1981.67 h27
  text "C21" at 3546.2,1963.33 h27
  text "R66" at 3143.56,1961.67 h27
  text "LED1" at 5074.26,1958.33 h27
  text "R16" at 4529.7,1956.67 h27
  text "R47" at 4462.05,1951.67 h27 r90
  text "R121" at 4689.77,1948.33 h27
  text "C46" at 4904.29,1945 h27
  text "R106" at 4978.55,1945 h27
  text "R25" at 1693.07,1943.33 h27
  text "R38" at 4607.26,1943.33 h27
  text "Q15" at 4778.88,1943.33 h27
  text "R64" at 3140.26,1891.67 h27
  text "C20" at 3551.15,1888.33 h27
  text "U3" at 3023.1,1830 h27
  text "C19" at 3547.86,1830 h27
  text "R63" at 3141.91,1828.33 h27
  text "C62" at 6199.67,1826.67 h27
  text "C64" at 6732.67,1825 h27
  text "P1" at 1158,1821 h27
  text "C54" at 5663.37,1788.33 h27
  text "U22" at 6354.78,1765 h27
  text "C18" at 3551.15,1763.33 h27
  text "R62" at 3143.56,1755 h27
  text "R168" at 1287,1745 h27
  text "C66" at 4866.34,1715 h27
  text "R61" at 3148.51,1686.67 h27
  text "C17" at 3551.15,1670 h27
  text "SW" at 690,1627 h27
  text "C" at 124,1625 h108 r180
  text "C71" at 2392.74,1623.33 h27
  text "R60" at 3141.91,1610 h27
  text "C16" at 3552.81,1610 h27
  text "C57" at 5749.18,1598.33 h27
  text "R167" at 4420.79,1563.33 h27
  text "R114" at 5191.42,1510 h27
  text "U28" at 4661.72,1501.67 h27
  text "U29" at 4929.04,1500 h27
  text "C69" at 3085.81,1476.67 h27
  text "Q13" at 5095.71,1471.67 h27
  text "C70" at 1985.15,1468.33 h27
  text "R169" at 1184,1431 h27
  text "R75" at 2420.79,1410 h27
  text "U5" at 3145.22,1400 h27
  text "C72" at 2635.31,1398.33 h27
  text "D3" at 2135.31,1376.67 h27
  text "X1" at 4189.77,1323.33 h27
  text "C35" at 4242.57,1316.67 h27
  text "C28" at 4331.68,1316.67 h27
  text "C24" at 2438.94,1285 h27
  text "Q12" at 4704.62,1285 h27
  text "R101" at 4424.09,1270 h27
  text "R110" at 4595.71,1263.33 h27
  text "C43" at 4793.73,1263.33 h27
  text "R120" at 4882.84,1263.33 h27
  text "R119" at 4983.5,1261.67 h27
  text "STATE1" at 4500,1221.67 h27
  text "R21" at 2095.71,1220 h27
  text "IN4" at 587.46,1216.67 h27
  text "C65" at 909.24,1206.67 h27
  text "Q23" at 2402.64,1195 h27
  text "D7" at 5094.06,1178.33 h27
  text "R22" at 2100.66,1146.67 h27
  text "R15" at 904.29,1126.67 h27
  text "D10" at 6153.47,1090 h27
  text "R6" at 909.24,1058.33 h27
  text "C39" at 2447.73,1053.67 h27
  text "UART" at 1765.68,1008.33 h27
  text "STATE2" at 2445.55,996.67 h27
  text "D4" at 2240.92,993.33 h27 r90
  text "R7" at 896.04,983.33 h27
  text "R161" at 1148.51,983.33 h27
  text "PW_UP" at 437.29,958.33 h27
  text "2012-03-14" at 3743.6,927.34 h60
  text "R162" at 1145.22,910 h27
  text "R5" at 894.39,905 h27
  text "R35" at 2405.94,900 h27
  text "SPEEKER1" at 5305.28,885 h27
  text "DAT" at 471.95,873.33 h27
  text "R163" at 1146.86,836.67 h27
  text "R4" at 891.09,835 h27
  text "D" at 132,799 h108 r180
  text "CLK" at 457.1,785 h27
  text "R164" at 1146.86,768.33 h27
  text "R3" at 889.44,755 h27
  text "SJ101012" at 1836.63,751.67 h108
  text "R165" at 1143.57,703.33 h27
  text "R20" at 1803.63,700 h27 r90
  text "R30" at 2023.1,683.33 h27 r90
  text "R113" at 4120.46,683.33 h27 r90
  text "R44" at 2600.66,681.67 h27 r90
  text "R86" at 3625.41,681.67 h27 r90
  text "R105" at 3947.19,681.67 h27 r90
  text "R82" at 3463.7,680 h27 r90
  text "R93" at 3795.38,678.33 h27 r90
  text "R50" at 2764.03,676.67 h27 r90
  text "R126" at 4452.15,676.67 h27 r90
  text "R59" at 3117.16,675 h27 r90
  text "R118" at 4292.08,675 h27 r90
  text "KEY" at 470.3,673.33 h27
  text "R2" at 894.39,673.33 h27
  text "R55" at 2950.49,671.67 h27 r90
  text "R140" at 4785.48,671.67 h27 r90
  text "R133" at 4625.41,670 h27 r90
  text "R150" at 5113.86,668.33 h27 r90
  text "R144" at 4948.85,666.67 h27 r90
  text "D11" at 5293.73,636.67 h27 r90
  text "R166" at 1156.77,623.33 h27
  text "R77" at 3346.54,620 h27 r90
  text "R1" at 897.69,608.33 h27
  text "C56" at 6061.06,596.67 h27
  text "PW_DW" at 432.34,588.33 h27
  text "R19" at 1889.44,585 h27 r90
  text "V3.0" at 2084.16,575 h108
  text "C3" at 1757.43,563.33 h27 r90
  text "R98" at 5348.19,558.33 h27
  text "R94" at 5437.29,558.33 h27
  text "R23" at 1950.49,556.67 h27 r90
  text "R91" at 5528.05,556.67 h27
  text "R90" at 5613.86,553.33 h27
  text "C5" at 2067.66,548.33 h27 r90
  text "R170" at 6136.96,538.33 h27
  text "R116" at 4339.93,535 h27 r90
  text "C38" at 3871.29,533.33 h27 r90
  text "R143" at 5011.55,533.33 h27 r90
  text "C8" at 2529.7,531.67 h27 r90
  text "R84" at 3683.17,531.67 h27 r90
  text "C47" at 4511.55,531.67 h27 r90
  text "R42" at 2656.77,530 h27 r90
  text "C11" at 2821.78,530 h27 r90
  text "R57" at 3051.16,528.33 h27 r90
  text "C30" at 3519.8,528.33 h27 r90
  text "C33" at 3557.76,528.33 h27 r90
  text "C53" at 4839.93,528.33 h27 r90
  text "C13" at 2879.54,526.67 h27 r90
  text "C14" at 3178.22,526.67 h27 r90
  text "R79" at 3400.99,526.67 h27 r90
  text "R89" at 3732.67,526.67 h27 r90
  text "R104" at 4006.6,526.67 h27 r90
  text "C42" at 4176.57,526.67 h27 r90
  text "R124" at 4397.69,526.67 h27 r90
  text "R131" at 4668.32,526.67 h27 r90
  text "C26" at 3219.47,525 h27 r90
  text "R74" at 3338.28,525 h27 r90
  text "R109" at 4054.46,525 h27 r90
  text "C45" at 4219.47,525 h27 r90
  text "C52" at 4551.15,525 h27 r90
  text "C58" at 4879.54,525 h27 r90
  text "R46" at 2699.67,523.33 h27 r90
  text "R12" at 2995.05,521.67 h27 r90
  text "R139" at 4727.72,521.67 h27 r90
  text "R149" at 5059.41,260 h27 r90
  text "ACPORT" at 6013.2,228.33 h27
  text "IN5" at 5579.21,61.67 h27
  text "IN2" at 2877.89,55 h27
  text "IN3" at 1737.62,53.33 h27
  text "IN1" at 4288.78,53.33 h27
Top Solder:
  lines w50: 1448.85,2898.33 1448.85,3901.67 ; 1562.71,2788.33 1721.12,2788.33 ; 1863.04,2788.33 2021.45,2788.33 ; 2161.72,2788.33 2320.13,2788.33 ; 2460.4,2788.33 2618.81,2788.33 ; 2754.13,2796.67 2912.54,2796.67 ; 3054.46,2796.67 3212.87,2796.67 ; 3348.18,2796.67 3506.6,2796.67 ; 3648.52,2796.67 3806.93,2796.67 ; 3950.49,2796.67 4108.91,2796.67 ; 4249.18,2796.67 4407.59,2796.67 ; 4551.15,2796.67 4709.57,2796.67 ; 4851.48,2796.67 5009.9,2796.67 ; 5150.16,2796.67 5308.58,2796.67 ; 5463.7,2795 5622.11,2795 ; 5745.88,2796.67 5904.29,2796.67 ; 6051.15,2796.67 6209.57,2796.67 ; 6348.19,2796.67 6506.6,2796.67 ; 6665.02,2798.33 6823.43,2798.33
Bottom Solder:
  lines w40: 6531.35,4169.17 6531.35,4244.17
  lines w45: 2824.26,4319.17 6457.1,4319.17 6531.35,4244.17